# Altium PCB Voltage_Regulator.PcbDoc
Units mm, origin at the board's own origin, x right, y up, seen from the top; angles counter-clockwise.
Board outline 39.8 x 30 mm, 2 copper layers (Top Layer, Bottom Layer); 10 components, 6 nets, 29 pads, 0 vias.
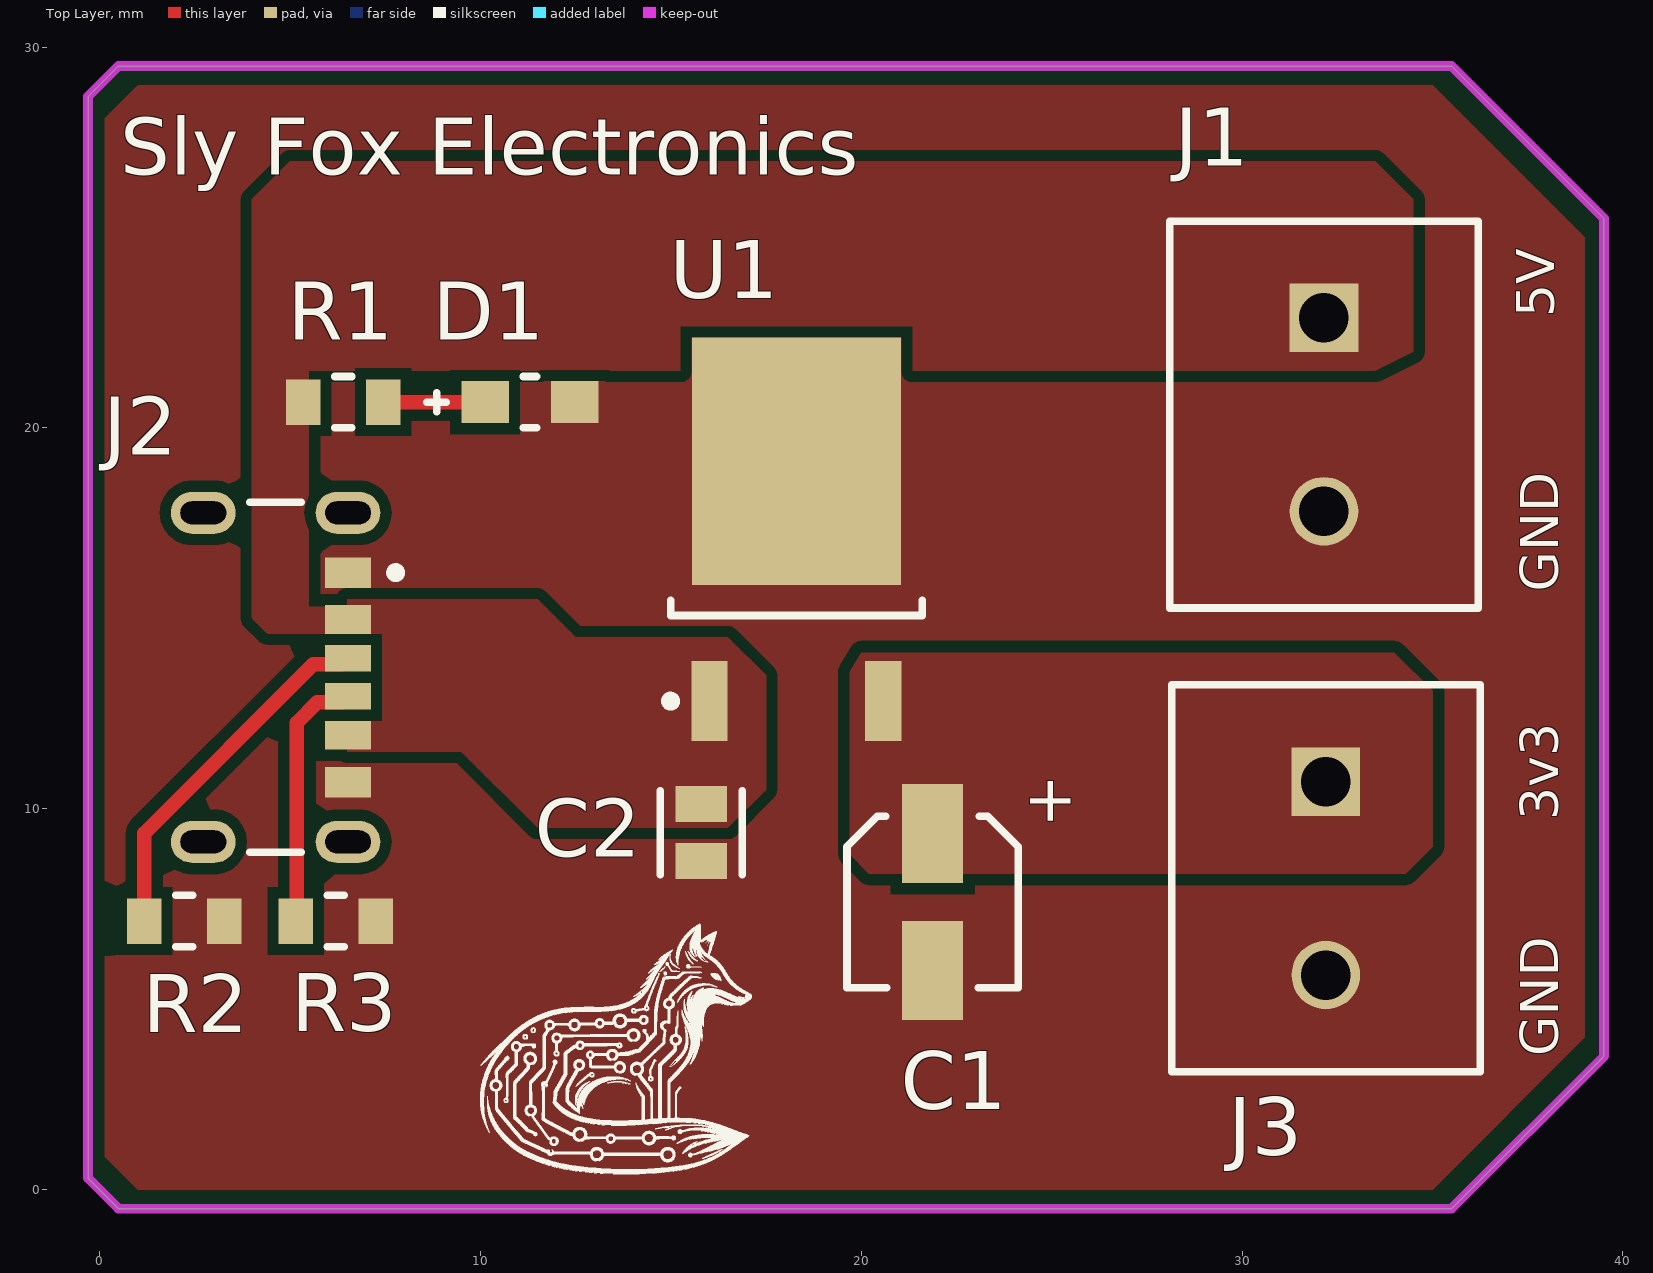
[diagram p0: Top Layer view]
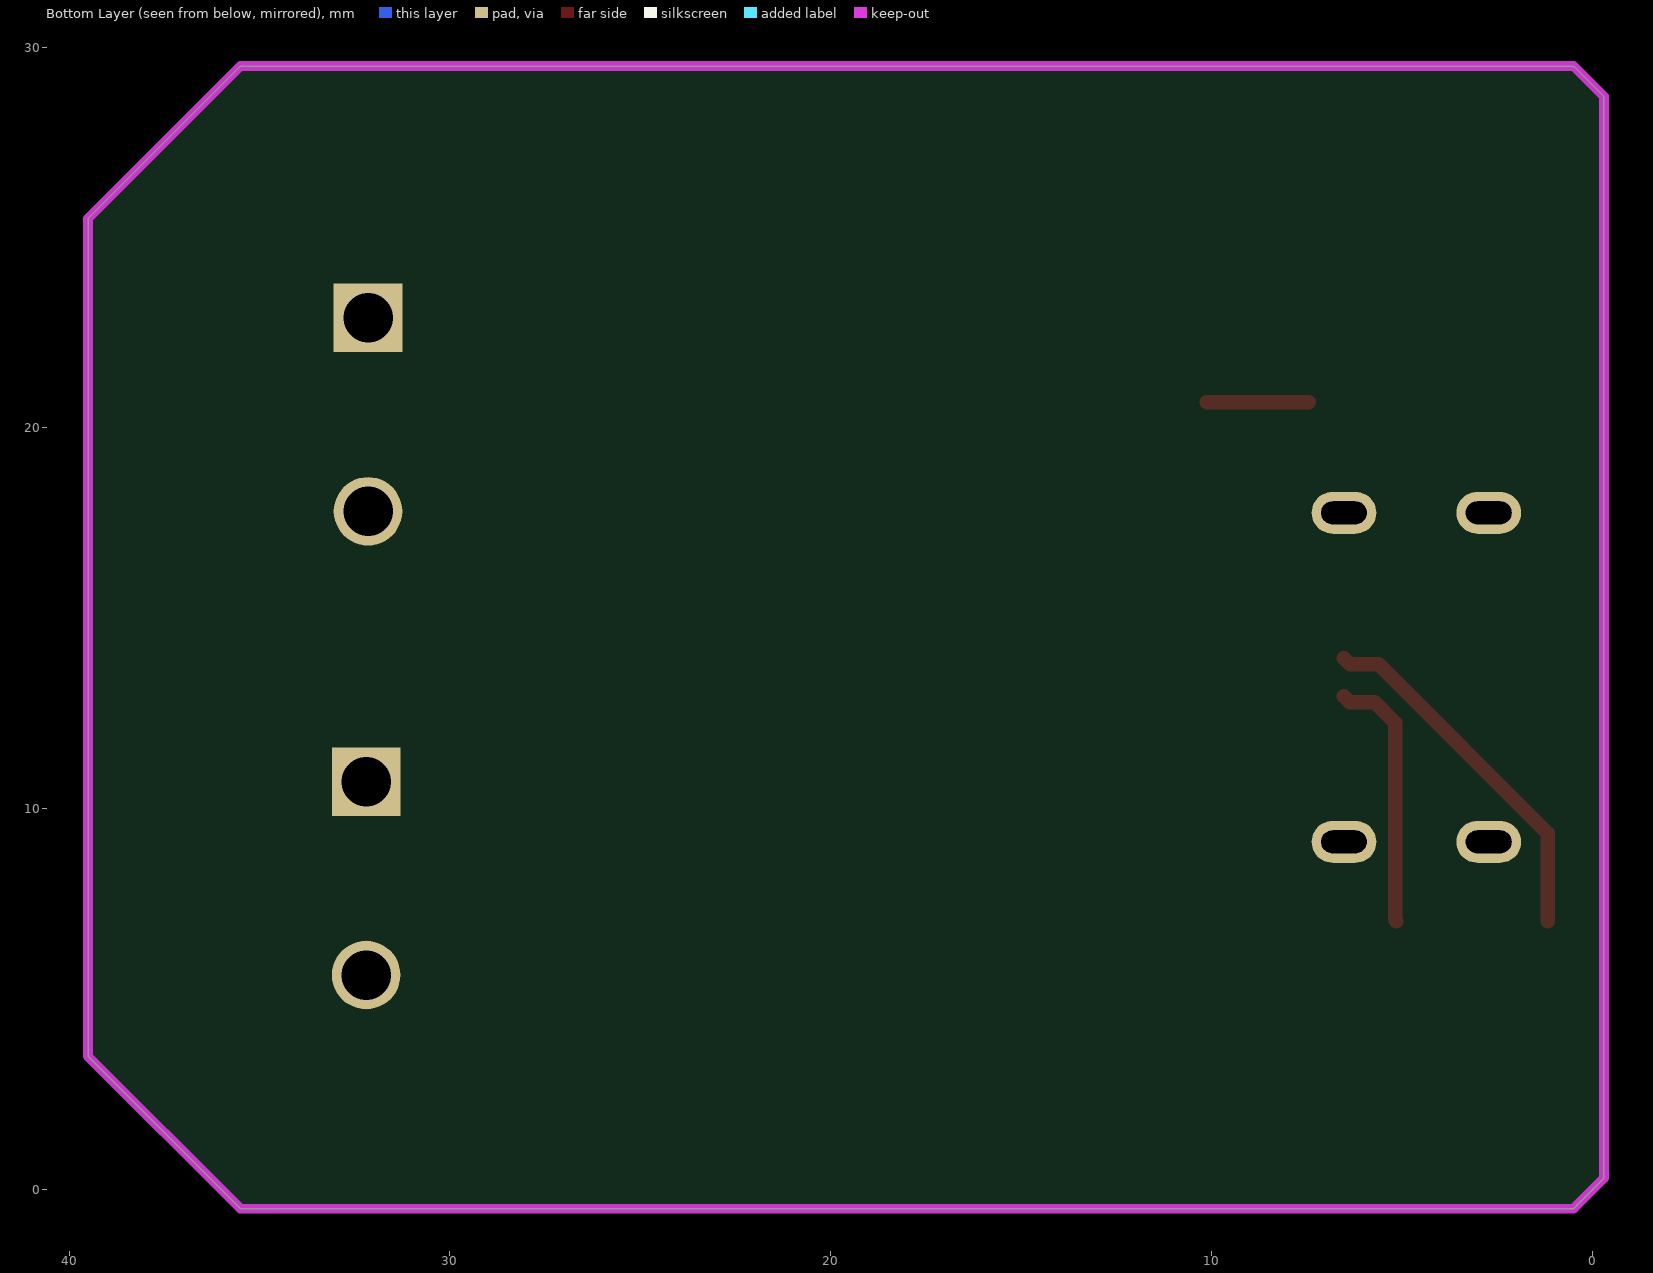
[diagram p1: Bottom Layer view, seen from below]
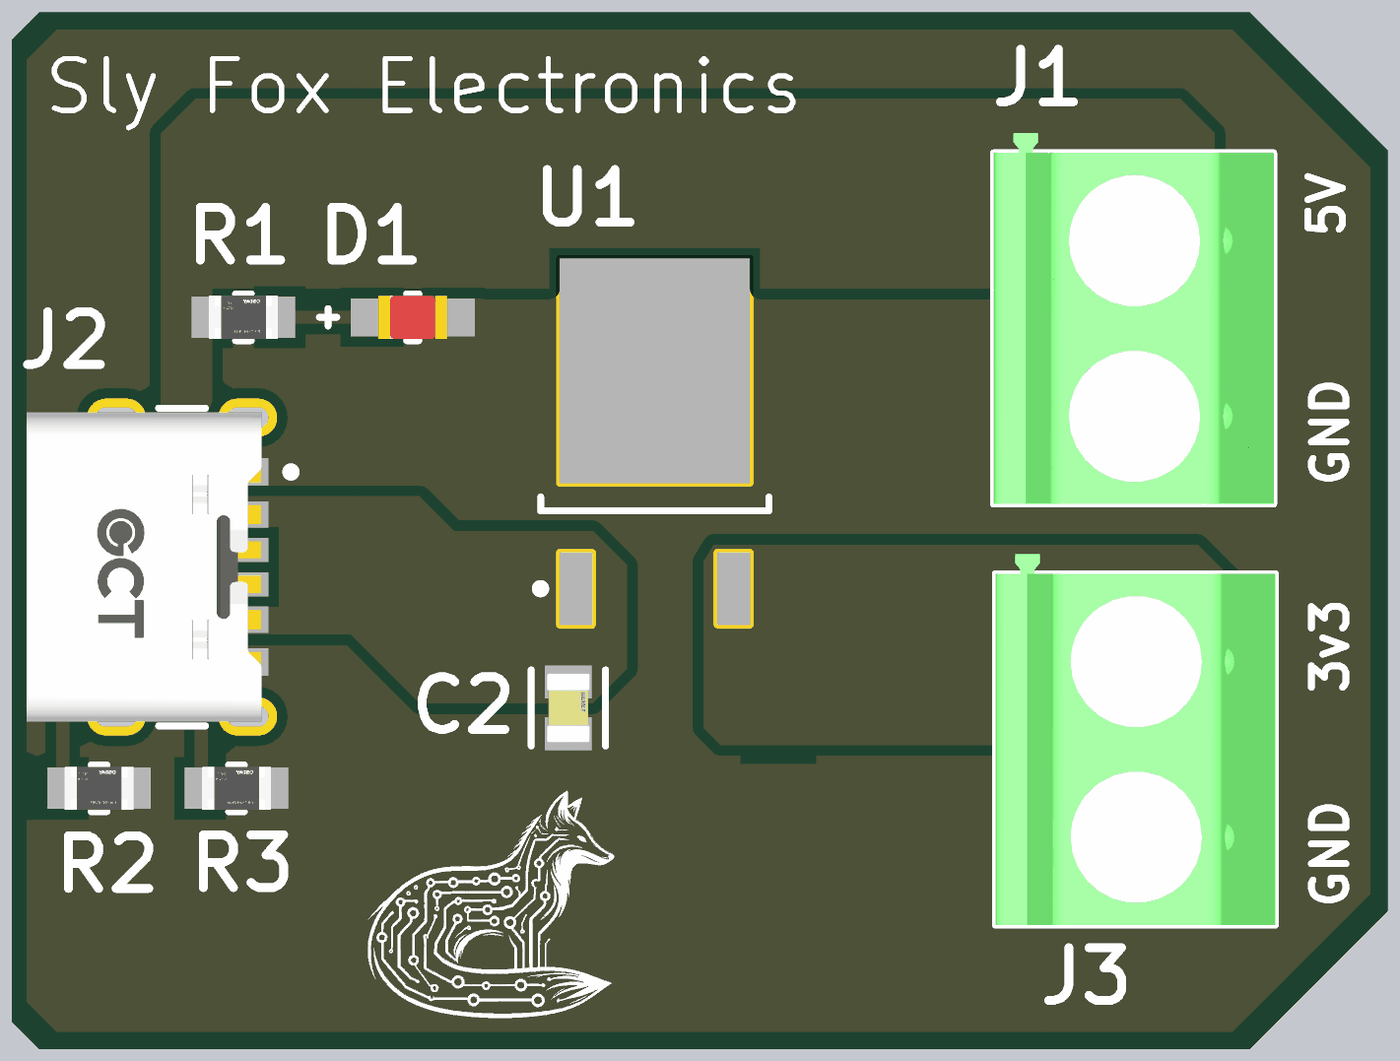
[diagram p2: 3D render of the assembled board from above, using the file's embedded part models]

## Layer stack, top to bottom
Top Solder: solder mask 0.0102, Solder Resist, Dk 3.5
Top Layer: signal copper 0.0356
Dielectric 1: dielectric 0.32, FR-4, Dk 4.8
Bottom Layer: signal copper 0.0356
Bottom Solder: solder mask 0.0102, Solder Resist, Dk 3.5

## Board outline
-0.3,0.3 0.5,-0.5 35.5,-0.5 39.5,3.5 39.5,25.5 35.5,29.5 0.5,29.5 -0.3,28.7

## Design rules (kind name [scope] priority, off if disabled: settings)
Clearance [All] p1: gap=0.3 ignorepadtopadclearanceinfootprint=TRUE
HoleSize [All] p1: absolutevalues=TRUE maxlimit=5.54 minlimit=0.5 maxpercent=80.000 minpercent=20.000
PolygonConnect [All] p1: connectstyle=Direct reliefconductorwidth=0.254 reliefentries=4 polygonreliefangle="90 Angle" airgapwidth=0.254
RoutingVias [All] p1: holewidth=0.711 width=1.27 viastyle="Through Hole" minholewidth=0.5 minwidth=1.27 maxholewidth=0.711 maxwidth=1.27
SolderMaskExpansion [All] p1: expansion=0.102 istentingtop=FALSE
SupplyNets "Schematic Supply Nets_3" [InNet('+5V')] p1: voltage=0.000
SupplyNets "Schematic Supply Nets_2" [InNet('+3v3')] p2: voltage=0.000
SupplyNets "Schematic Supply Nets_1" [InNet('GND')] p3: voltage=0.000
Width [All] p1: maxlimit=1 minlimit=0.3 preferedwidth=0.5
29 further rules are at their usual default settings.

## Components (designator, comment, footprint, x,y, rotation, side; value= is the part's Value field where it differs from the comment)
C1 "2.2 pF" WCAP-ASLI_D4H5.5 -1248.125,1277.55 r90 top
C2 "100 nF" FP-C0805C-DN-MFG 15.8,9.375 r270 top value="0.10 μF"
D1 "AP2012EC" FP-AP2012EC-MFG 11.3,20.675 r0 top
J1 "1729128" PHOE-1729128-2_V 32.15,20.35 r270 top
J2 "USB4125-GF-A-0190" FP-USB4125-GF-A-0190-MFG 3.525,13.45 r270 top
J3 "1729128" PHOE-1729128-2_V 32.2,8.175 r270 top
R1 "330 ohm" FP-RT0805-MFG 6.4,20.675 r0 top value=604KΩ
R2 "5.1K ohm" FP-RT0805-MFG 2.225,7.05 r0 top value=604KΩ
R3 "5.1K ohm" FP-RT0805-MFG 6.2,7.05 r0 top value=604KΩ
U1 "LF33CDT-TR" TO-252_N 18.3,17.075 r90 top

## Footprints (in the part's own frame and the unit in brackets; to place one, negate y for a bottom-side part, rotate by r counter-clockwise, add the part's x,y. Pads: shape width x height; smd on the part's side, far side on the other; paste and mask are expansions set on the pad)
FP-AP2012EC-MFG [mm]
  rect 1.25x1.1 smd paste+0 mask+0: 1(-1.175,0) 2(1.175,0)
  silkscreen extent -2.7,-0.67 0.18,0.67, body extent -1.9,-0.77 1.9,0.77, height 0.25
FP-C0805C-DN-MFG [mm]
  rect 0.95x1.35 smd paste+0 mask+0: 1(-0.75,0) 2(0.75,0)
  silkscreen extent -1.1,-1.07 1.1,1.07, body extent -1.4,-0.85 1.4,0.85, height 0.25
FP-RT0805-MFG [mm]
  rect 0.9x1.2 smd paste+0 mask+0: 1(-1.05,0) 2(1.05,0)
  silkscreen extent -0.23,-0.67 0.23,0.67, body extent -1.6,-0.77 1.6,0.77, height 0.25
FP-USB4125-GF-A-0190-MFG [mm]
  rrect100% 1.1x1.7 hole 1.2 slot 0.6 at 0 deg paste-2539.97 mask+0: 1(-4.32,3) 2(4.32,3) 3(-4.32,-0.8) 4(4.32,-0.8)
  rect 0.7x1.2 smd paste+0 mask+0: A5(-0.5,3) B5(0.5,3)
  rect 0.76x1.2 smd paste+0 mask+0: A9(1.52,3) B9(-1.52,3)
  rect 0.8x1.2 smd paste+0 mask+0: A12(2.75,3) B12(-2.75,3)
  silkscreen extent -4.59,0.43 4.59,4.38, body extent -4.97,-3.57 4.97,3.95, height 0.25
PHOE-1729128-2_V [mm] "Receptacle, 2-Leads, Body 8.1x10.16mm, Pitch 5.08mm"
  rect 1.8x1.8 hole 1.3: 1(-2.54,0)
  round 1.8 hole 1.3: 2(2.54,0)
  silkscreen extent -5.08,-4.05 5.08,4.05, body extent -5.65,-4.05 5.08,4.05, height 10.01
TO-252_N [mm] "D-PAK, 4-Leads, Body 6.1x6.5mm, Pitch 2.28mm, Lead Span 9.7mm, IPC Medium Density"
  rect 2.1x0.95 smd: 1(-4.25,2.28) 3(-4.25,-2.28)
  rect 6.5x5.5 smd: 4(2.05,0)
  silkscreen extent -4.37,-3.3 -1.6,3.43, body extent -2,-3.3 4.2,3.3, height 2.4
WCAP-ASLI_D4H5.5 [mm] "Aluminium Electrolytic V-Chip SMT Capacitors, 4x5.5mm"
  rect 2.6x1.6 smd: 1(-1268.2,-1270) 2(-1271.8,-1270)
  silkscreen extent -1272.25,-1272.25 -1267.75,-1267.75, body extent -1272.5,-1272.15 -1267.5,-1267.85, height 5.5

## Part data
C1: library part CMP-03913-53914611-1, "865080640002 WCAP-ASLI Aluminum Electrolytic Capacitors", Capacitance=2.2µF, Case/Package=Radial, ESR (Equivalent Series Resistance)=3.36762Ω, Insulation Resistance=16.6667MΩ, Leakage Current=3µA, Max Operating Temperature=105°C, Min Operating Temperature=-55°C, Ripple Current=55mA, Tolerance=20%, Voltage Rating=50V, Diameter=4mm, Height=5.5mm, Height - Seated (Max)=5.5118mm, Impedance=4.5Ω, Length=5.5mm, Life (Hours)=2000hours, Material=Aluminium, Mount="Surface Mount", NexarPartId=53914611, Packaging="Tape & Reel (TR)", Polarity=Polar, REACH SVHC=Unknown, Ripple Current (AC)=55mA, RoHS=Compliant, Voltage Rating (DC)=50V, Width=4.3mm
C2: library part CMP-1036-04423-3, "CAP CER 0.1UF 50V X7R 0805", Capacitance="0.10 μF", Manufacturer=KEMET, Manufacturer Part Number=C0805C104M5RACTU, Package=C0805C-DN, Temperature="-55°C to +125°C", Temperature Characteristic=X7R, Temperature Coefficient=30ppm/°C, Temperature Range High=+125°C, Temperature Range Low=-55°C, Tolerance=0.2, Voltage Rating="50 V", Automotive=No, Category=Cap, ComponentLink2Description=Datasheet, ComponentLink2URL=https://content.kemet.com/datasheets/KEM_C1003_C0G_SMD.pdf, Device Class L1="Passive Components", Device Class L2=Capacitors, Device Class L3="Ceramic Capacitors", Digikey Description="CAP CER 0.1UF 50V X7R 0805", Height=0.88mm, Ipc Land Pattern Name=CAPC200125X78, Lead Free=Yes, Material=Ceramic, Mouser Description="Multilayer Ceramic Capacitors MLCC - SMD/SMT 50volts 0.1uF X7R 20%", Octopart=https://octopart.com/c0805c104m5ractu-kemet-129379, RoHS=TRUE
D1: library part CMP-44529-000070-1, "LED RED CLEAR SMD", Case Code (Imperial)=0805, Case Code (Metric)=2012, Color=Red, Forward Current=20mA, Forward Voltage=2V, Max Operating Temperature=85°C, Min Operating Temperature=-40°C, Package Quantity=2000, Case/Package=0805, Dominant Wavelength=625nm, Height=1.1mm, Illumination Color=Red, Lead Free="Lead Free", Length=2mm, Lens Style=Clear, Luminous Intensity=15mcd, Mount="Surface Mount", Packaging="Tape and Reel", RoHS Compliant=Yes, Test Current=20mA, Viewing Angle=120°, Wavelength=627nm, Width=1.25mm
J1 J3: library part CMP-2000-05815-1, "PCB Terminal Block, 13.5 A, 400 V, 2-Pin THD, RoHS, Bulk", Current Rating=13500mA, Manufacturer="Phoenix Contact", Package Description="2-Pin Through Hole Device, Body 8.1 x 10.16 mm, Pitch 5.08 mm", Package Reference=1729128-2, Package Version=03/2015, Voltage Rating=400V, Datasheet URL=https://datasheet.ciiva.com/16046/1729128-16046181.pdf, Datasheet Version=12/2013, Manufacturer URL=http://www.phoenixcontact.com/, Mounting Technology=ThroughHole, No. of Positions=2, No. of Rows=1, Orientation=Horizontal, Package URL=https://www.phoenixcontact.com/online/portal/pi/pxc/product_detail_page/!ut/p/b1/3VdJjqNKFDxLH8AFycySyWY2ozFsEPOMMQaDOX1XedGL_1Vdm5YXJleknhSKeBkvI6EA8ncAo3AYoDhBQGco6KN7VURTdemj9us_IEKEZo_YHiPAEWEFmDGOHMORkqKYCORBZxgL7ZoaZYcbFFUZ3fqxSY6GOuxydWUuHqz1ynmMFygu583Bob0Ewr6Sd_l-5m-kAueHiB0jpRwZwe58wwtkpxtMYd_LmGcDRU02dRNEyWt6Y2ti5pSyJ_reIkzIulrqApdnbT11V5jnCKbYNCvhEM1MCpPByat_X379-iThf08CI5GfOPqfBeS3BRoBOdD55AKVv0iLwCMq-2BrzXWSGRH7pUGD9uwXQjiph3xL0DKQwdGa0JImiIOmBNOestqgwTHSSs2oOep-78apyXQBvNi8ZLaFjvjWvcaUEBu0MC6Wbe-d6mB0FAebo2lUWinqYaZs5DAYzV0RP9yitUjnGJ0iI9xhZkT42OCQNUJJhkgWINNQLP2JFP6OpMg3JCVg70jqHT0lvKOnhHf0lPuOnnLf0VPuWx6_dxwUIvwk5WMkT0kLL1mh61l2yZVSzG3pYV_bqo-mj6uMKwKwdnnW8Jh5RTOJzMOA5c-eJDaZQw4mTMPH02PvS_ZAqNVjVTo2WyYLkwH_KU1mmmG5kjRhDqPXLwwVHvVOjCM60-fpXvTDfMGW1PVFVS1r4e4yVDk4ZdNbkUHvqPqQSeian4UD39fNKmachqdJ1NJbyk8rXT9mXTvPk3oE5meulKGgiruPJek-4I9hTT6G8ZLOyRSm2RRVbThERQad5OS28hdt4YW4vG0stgYYzsWsK4_7y6DZMjJSCqri1kyiZR5vD7pwIrNR7QwPHTcLTI5qT7eRlpHrdGiupYlqQDJ7zy_CND8fWWBoLRXxk1RVcXiBQwbTD4Xi7KL-FuO94t9xaqweXzH, Packing=Bulk, PartNumber=1729128, Pitch=5.08mm, RoHS=TRUE
J2: library part CMP-245163-000004-1, "CONN RCPT TYPE C 6P SMD RA"
R1 R2 R3: library part CMP-03412-014864-1, "RES SMD 604K OHM 0.1% 1/8W 0805", Manufacturer=Yageo, Manufacturer Part Number=RT0805BRD07604KL, Package=RT0805, Power Rating=0.125W, Resistance=604KΩ, Temperature="-55°C to +155°C", Temperature Coefficient="25 ppm/°C", Temperature Range High=+155°C, Temperature Range Low=-55°C, Tolerance=0.0025, Voltage Rating=150V, Automotive=No, Category=Res, ComponentLink2Description=Datasheet, ComponentLink2URL=http://www.yageo.com/documents/recent/PYu-RT_1-to-0.01_RoHS_L_9.pdf, Composition="Thin Film", Device Class L1="Passive Components", Device Class L2=Resistors, Device Class L3="Chip SMD Resistors", Digikey Description="RES SMD 604K OHM 0.1% 1/8W 0805", Footprint Url=http://www.yageo.com/exep/pages/download/literatures/PYu-R_Mount_10.pdf, Height=0.6mm, Ipc Land Pattern Name=RESC200125X50, Lead Free=Yes, Mouser Description="Thin Film Resistors - SMD 604K ohm 0.1% 1/8W", Octopart=https://octopart.com/rt0805brd07604kl-yageo-1479051, RoHS=TRUE, Series=RT
U1: library part CMP-0244-00069-1, "500mA, Very Low Drop (0.45V) Voltage Regulator, 3.3V, 3-Pin DPAK, Tape and Reel", ComponentLink1Description="Manufacturer URL", ComponentLink1URL=http://www.st.com, ComponentLink2Description=Datasheet, ComponentLink2URL=http://www.st.com/internet/com/TECHNICAL_RESOURCES/TECHNICAL_LITERATURE/DATASHEET/CD00000546.pdf, DatasheetVersion=1/11/2010, PackageDescription="3-Pin Transistor Outline Package 2.28 mm Pitch, 9.7 mm Lead Span (DPAK)", PackageReference=TO-252, PackageVersion=2011

## Nets (pads, with @x,y where several pads share a name; then routed paths per layer and width w, separated by ;. In a path a pad name is that pad's centre, name@x,y a point inside that pad or via, vN(x,y) a via of type N, cw(c..) or ccw(c..) an arc to the next point about the centre after c; other vN are vias at no path point)
+3v3: C1.1 J3.1 U1.3
+5V: C2.1 J1.1 J2.A9 J2.B9 R1.1 U1.1
CC1: J2.A5 R2.1 | length 9.6
  Top Layer w0.381: R2.1 1.175,9.351 5.614,13.791 6.366,13.791 J2.A5
CC2: J2.B5 R3.1 | length 6.9
  Top Layer w0.381: R3.1 5.185,7.085 5.185,12.263 5.722,12.801 6.376,12.801 J2.B5
GND: C1.2 C2.2 D1.2 J1.2 J2.A12 J2.B12 J3.2 R2.2 R3.2 U1.4
NetD1_1: D1.1 R1.2 | length 2.7
  Top Layer w0.381: R1.2 D1.1
pads on no net: J2.1 J2.2 J2.3 J2.4

## Polygon pours and split planes (outlines as drawn)
GND on Top Layer "NONET_L-01_P-001" (solid, remove dead copper, pour order 16): 39,25 35,29 1,29 0,28 0,1 1,0 35,0 39,4
+5V on Top Layer "NONET_L-01_P-001" (solid, remove dead copper, pour order 13): 4,21.5 4,26 5,27 33.5,27 34.5,26 34.5,22 33.5,21.5
+5V on Top Layer "NONET_L-01_P-001" (solid, remove dead copper, pour order 11): 6.4,15.3 5.5,15.3 5.5,21.5 5,22 4.5,22 4,21.5 4,15 4.4,14.6 6.05,14.6
+5V on Top Layer "NONET_L-01_P-001" (solid, remove dead copper, pour order 7): 6.5,15.5 11.5,15.5 12.5,14.5 16.5,14.5 17.5,13.5 17.5,10.5 16.5,9.5 11.5,9.5 9.5,11.5 6.5,11.5
+3v3 on Top Layer "NONET_L-01_P-001" (solid, remove dead copper, pour order 3): 19.7,13.6 20,14.1 34,14.1 35,13.1 35,9 34.3,8.3 20.2,8.3 19.7,8.8

## Keep-outs
Keep-Out Layer:
  lines w0.254: 3.6,29.5 0.5,29.5 -0.3,28.7 -0.3,0.3 0.5,-0.5 35.5,-0.5 39.5,3.5 39.5,25.5 35.5,29.5 3.6,29.5 ; 3.6,29.5 3.6,29.5

## Silkscreen, mask and mechanical layers (free items; w line width, h text height)
Top Overlay:
  drawing of 38 lines, arcs and shapes, not listed
  text "Sly Fox Electronics" at 0.55,26.65 h1.5
  text "5V" at 38.2,22.9 h1 r90
  text "GND" at 38.3,15.7 h1 r90
  text "3v3" at 38.3,9.7 h1 r90
  text "GND" at 38.3,3.5 h1 r90

## Text inside footprints (layer, text, board x,y; h text height)
C1: Top Overlay "+" at 25.5,9.5 h1.22 r90